# Altium PCB 智能笔 - 2个按键.PCBDOC
Units mil, origin at the board's own origin, x right, y up, seen from the top; angles counter-clockwise.
Board outline 1121.76 x 345.44 mil, 2 copper layers (TopLayer, BottomLayer); 9 components, 40 nets, 24 pads, 15 vias.
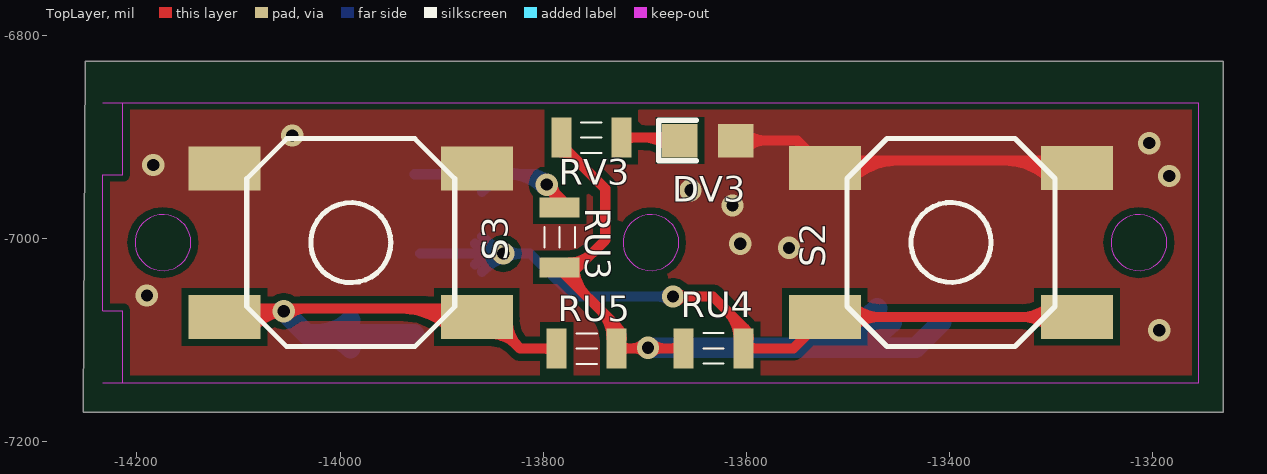
[diagram p0: TopLayer view]
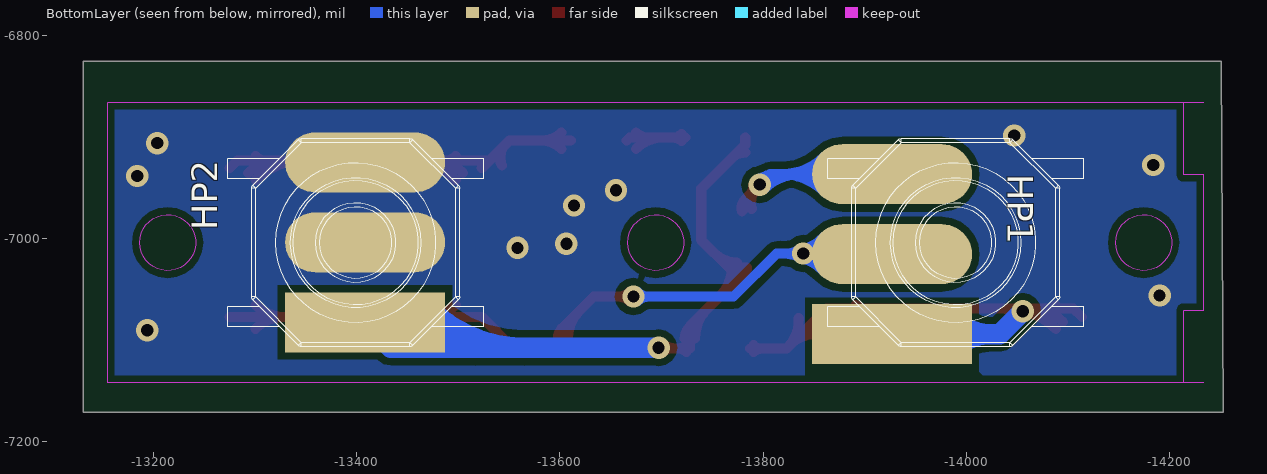
[diagram p1: BottomLayer view, seen from below]

## Layer stack, top to bottom
TopLayer: signal copper 1.4
Dielectric: core 12.6, FR-4, Dk 4.8
BottomLayer: signal copper 1.4

## Board outline
-14250.87,-6825.78 -13130.93,-6825.78 -13130.93,-7171.21 -14252.69,-7171.21

## Design rules (kind name [scope] priority, off if disabled: settings)
Clearance [All] p1: gap=7
ComponentClearance [All] p1 off: gap=10 collisioncheckmode=3
FanoutControl Fanout_LCC [All] p1 off: bgadir=Out bgaviamode=Centered fanoutstyle=Auto fanoutdirection=Alternating viagrid=1 // Protel DXP Scope 1 Expression Was: IsLCC   Fanout_LCC (Default Rule)
FanoutControl Fanout_BGA [All] p2 off: bgadir=Out bgaviamode=Centered fanoutstyle=Auto fanoutdirection=Alternating viagrid=1 // Protel DXP Scope 1 Expression Was: IsBGA   Fanout_BGA (Default Rule)
FanoutControl Fanout_SOIC [All] p3 off: bgadir=Out bgaviamode=Centered fanoutstyle=Auto fanoutdirection=Alternating viagrid=1 // Protel DXP Scope 1 Expression Was: IsSOIC   Fanout_SOIC (Default Rule)
FanoutControl Fanout_Default [All] p4: bgadir=Out bgaviamode=Centered fanoutstyle=Auto fanoutdirection=Alternating viagrid=1 // Fanout_Default (Default Rule)
FanoutControl Fanout_Small [All] p5 off: bgadir=Out bgaviamode=Centered fanoutstyle=Auto fanoutdirection=Alternating viagrid=1 // Protel DXP Scope 1 Expression Was: (CompPinCount < 5)   Fanout_Small (Default Rule)
PolygonConnect [All] p1: connectstyle=Direct reliefconductorwidth=10 reliefentries=4 polygonreliefangle="90 Angle"
RoutingVias [All] p1: holewidth=28 width=50 viastyle="Through Hole" minholewidth=28 minwidth=50 maxholewidth=28 maxwidth=50
SolderMaskExpansion [All] p1: expansion=4
TestPointUsage [All] p1: valid=0 allowmultiple=FALSE
Testpoint [(IsPad And (OnTopLayer Or OnBottomLayer))] p1: side=3 testpointundercomponent=TRUE minsize=40 maxsize=100 preferedsize=60 minholesize=20 maxholesize=40 preferedholesize=32 testpointgrid=1 style=297 order=-539222988
Width [All] p1: maxlimit=1111 minlimit=1 preferedwidth=10
12 further rules are at their usual default settings.

## Components (designator, comment, footprint, x,y, rotation, side; value= is the part's Value field where it differs from the comment)
DV3 "RED" 0603 -13637.54,-6903.73 r0 top
HP1 "Header 3" "2.0 3P 焊盘" -13926.81,-7094.25 r0 bottom
HP2 "Header 3" "2.0 3P 焊盘" -13408.18,-7082.57 r0 bottom
RU3 "10k" 0603-1 -13783.88,-6998.94 r270 top
RU4 "10k" 0603-1 -13632.56,-7108.28 r180 top
RU5 "10K" 0603-1 -13757.4,-7108.49 r0 top
RV3 "1K" 0603-1 -13752.81,-6900.72 r0 top
S2 "SW-PB" SW_smt4*4 -13398.84,-7003.98 r180 top
S3 "SW-PB" SW_smt4*4 -13989.6,-7004.21 r180 top

## Footprints (in the part's own frame and the unit in brackets; to place one, negate y for a bottom-side part, rotate by r counter-clockwise, add the part's x,y. Pads: shape width x height; smd on the part's side, far side on the other; paste and mask are expansions set on the pad)
"2.0 3P 焊盘" [mm]
  rect 4x1.5 smd: 1(0,0)
  oval 4x1.5 smd: 2(0,-2) 3(0,-4)
0603 [mil]
  rect 35x33 smd: 1(-28,0) 2(27,0)
  silkscreen extent -49,-20 -12,20
0603-1 [mm] "1.6mm*0.8mm*0.8mm"
  rect 0.5x1 smd: 1(-0.75,0) 2(0.75,0)
  silkscreen extent -0.25,-0.38 0.25,0.38
SW_smt4*4 [mm]
  rect 1.8x1.1 smd: 1(-3.153,1.859) 1(3.153,1.859) 2(-3.153,-1.859) 2(3.153,-1.859)
  silkscreen extent -2.6,-2.6 2.6,2.6

## Part data
DV3: library part LED1, "Typical RED GaAs LED"
HP1 HP2: "Header, 3-Pin"
RU3 RU4 RU5 RV3: library part Res2, "Resistor"
S2 S3: "Switch"

## Via types
v1: diameter 22, hole 12, TopLayer to BottomLayer, 15 vias

## Nets (pads, with @x,y where several pads share a name; then routed paths per layer and width w, separated by ;. In a path a pad name is that pad's centre, name@x,y a point inside that pad or via, vN(x,y) a via of type N, cw(c..) or ccw(c..) an arc to the next point about the centre after c; other vN are vias at no path point)
3.3V: HP2.1 RU3.2 RU4.2 RU5.2 RV3.1 | length 1226.9
  TopLayer w10: RV3.1 -13782.33,-6907.84 -13739.07,-6951.11 -13739.07,-7001.66 -13765.89,-7028.47 RU3.2 -13783.88,-7030.58 -13727.87,-7086.59 RU5.2 -13727.67,-7108.28 RU4.2 ; -13713.14,-7108.28 ccw(c-13713.14,-7091.52) v1@-13701.29,-7103.37 ; -13709.92,-7108.28 cw(c-13709.92,-7120.49) v1@-13701.29,-7111.86 ; v1@-13692.8,-7111.86 cw(c-13684.17,-7120.49) -13684.17,-7108.28 ; v1@-13692.8,-7103.37 ccw(c-13680.95,-7091.52) -13680.95,-7108.28 ; -13727.87,-7086.95 cw(c-13739.56,-7086.95) -13731.3,-7095.22 ccw(c-13739.56,-7086.95) -13727.87,-7086.95 ; -13727.87,-7086.95 ccw(c-13716.18,-7086.95) -13724.45,-7095.22 cw(c-13716.18,-7086.95) -13727.87,-7086.95 ; -13673.78,-7108.28 cw(c-13673.78,-7119.97) -13665.51,-7111.71 ccw(c-13673.78,-7119.97) -13673.78,-7108.28 ; -13673.78,-7108.28 ccw(c-13673.78,-7096.59) -13665.51,-7104.86 cw(c-13673.78,-7096.59) -13673.78,-7108.28 ; RV3.1@-13782.33,-6915.41 cw(c-13782.33,-6933.66) -13769.43,-6920.75 ccw(c-13782.33,-6933.66) RV3.1@-13782.33,-6915.41 ; RU3.2@-13779.19,-7028.47 ccw(c-13762.79,-7028.47) -13774.39,-7040.07 cw(c-13762.79,-7028.47) RU3.2@-13779.19,-7028.47 ; RU3.2@-13774.04,-7023.63 ccw(c-13774.04,-6992.27) -13751.86,-7014.44 cw(c-13774.04,-6992.27) RU3.2@-13774.04,-7023.63 ; RU3.2@-13769.19,-7028.47 ccw(c-13728.65,-7028.47) -13757.32,-7057.14 cw(c-13728.65,-7028.47) RU3.2@-13769.19,-7028.47 ; -13744.66,-7069.79 cw(c-13773.52,-7098.64) -13732.71,-7098.64 ccw(c-13773.52,-7098.64) -13744.66,-7069.79 ; -13727.59,-7086.86 cw(c-13739.37,-7098.64) -13722.71,-7098.64 ccw(c-13739.37,-7098.64) -13727.59,-7086.86 ; RU5.2@-13724.45,-7111.91 cw(c-13715.69,-7120.67) -13715.69,-7108.28 ccw(c-13715.69,-7120.67) RU5.2@-13724.45,-7111.91 ; RU5.2@-13724.45,-7105.06 ccw(c-13716.67,-7097.29) -13716.67,-7108.28 cw(c-13716.67,-7097.29) RU5.2@-13724.45,-7105.06
  BottomLayer w20: v1(-13697.04,-7107.62) -13433.23,-7107.62 HP2.1 ; -13565.02,-7107.62 ccw(c-13565.02,-6974.95) HP2.1@-13471.21,-7068.76 ; -13516.73,-7107.62 ccw(c-13516.73,-7023.23) HP2.1@-13457.06,-7082.9
GND: DV3.2 HP2.2 HP2.3 S2.2 S3.2 | length 871.9
  TopLayer w10: DV3.2 -13550.04,-6903.73 S2.2@-13522.98,-6930.79 ; S2.2@-13530.33,-6923.44 -13282.05,-6923.44 S2.2@-13274.7,-6930.79 ; -13581.78,-6903.73 cw(c-13581.78,-6875.96) -13601.41,-6895.6 ccw(c-13581.78,-6875.96) -13581.78,-6903.73 ; -13581.78,-6903.73 ccw(c-13581.78,-6931.49) -13601.41,-6911.86 cw(c-13581.78,-6931.49) -13581.78,-6903.73 ; -13546.68,-6907.09 cw(c-13559.96,-6920.37) -13542.83,-6928.06 ccw(c-13559.96,-6920.37) -13546.68,-6907.09 ; S2.2@-13504.49,-6935.49 cw(c-13475.4,-6964.59) -13475.4,-6923.44 ccw(c-13475.4,-6964.59) S2.2@-13504.49,-6935.49 ; S2.2@-13497.42,-6942.56 cw(c-13451.26,-6988.73) -13451.26,-6923.44 ccw(c-13451.26,-6988.73) S2.2@-13497.42,-6942.56 ; S2.2@-13497.42,-6919.01 ccw(c-13486.73,-6908.32) -13486.73,-6923.44 cw(c-13486.73,-6908.32) S2.2@-13497.42,-6919.01 ; -13346.43,-6923.44 cw(c-13346.43,-6988.73) -13300.26,-6942.56 ccw(c-13346.43,-6988.73) -13346.43,-6923.44 ; -13322.28,-6923.44 cw(c-13322.28,-6964.59) -13293.19,-6935.49 ccw(c-13322.28,-6964.59) -13322.28,-6923.44 ; -13310.95,-6923.44 ccw(c-13310.95,-6908.32) -13300.26,-6919.01 cw(c-13310.95,-6908.32) -13310.95,-6923.44
  other v1: -13193.81,-7090.39 -14190.2,-7056.21 -13558.19,-7009.29 -13606.27,-7005.24 -13613.8,-6967.58 -13655.1,-6952.65 -13183.96,-6938.62 -14183.93,-6927.8 -13203.66,-6906.18 -14047.12,-6898.64
NetCU3_2: 
NetCY1_1: 
NetCY1_2: 
NetCY2_1: 
NetCY2_2: 
NetCY5_2: 
NetCY6_1: 
NetCY7_1: 
NetD81_1: 
NetD81_2: 
NetD91_2: 
NetDUT1_1: 
NetDUT1_2: 
NetDV1_1: 
NetDV3_1: DV3.1 RV3.2 | length 182.9
  TopLayer w10: RV3.2 -13668.55,-6900.72 DV3.1 ; -13711.59,-6900.72 cw(c-13711.59,-6889.03) -13719.86,-6897.3 ccw(c-13711.59,-6889.03) -13711.59,-6900.72 ; -13711.59,-6900.72 ccw(c-13711.59,-6912.41) -13719.86,-6904.14 cw(c-13711.59,-6912.41) -13711.59,-6900.72 ; -13701.57,-6900.72 cw(c-13701.57,-6938.75) -13674.68,-6911.86 ccw(c-13701.57,-6938.75) -13701.57,-6900.72 ; -13687.05,-6900.72 ccw(c-13687.05,-6883.22) -13674.68,-6895.6 cw(c-13687.05,-6883.22) -13687.05,-6900.72
NetRY4_2: 
NetRZ1_1: 
NetRZ3_2: 
NRST: 
PA1: 
PA2: 
PA3: 
PB4: 
PB5: 
PC3: HP1.1 RU5.1 S3.1 | length 1142.4
  TopLayer w10: S3.1@-14113.73,-7077.4 -14105.44,-7069.11 -13862.26,-7069.11 -13822.88,-7108.49 RU5.1 ; -14076.21,-7069.11 cw(c-14076.21,-7092.39) v1@-14059.75,-7075.93 ; v1@-14051.26,-7075.93 cw(c-14034.8,-7092.39) -14034.8,-7069.11 ; -13798.62,-7108.49 cw(c-13798.62,-7120.18) -13790.35,-7111.91 ccw(c-13798.62,-7120.18) -13798.62,-7108.49 ; -13798.62,-7108.49 ccw(c-13798.62,-7096.8) -13790.35,-7105.06 cw(c-13798.62,-7096.8) -13798.62,-7108.49 ; S3.1@-14095.25,-7082.1 cw(c-14063.87,-7113.49) -14063.87,-7069.11 ccw(c-14063.87,-7113.49) S3.1@-14095.25,-7082.1 ; S3.1@-14088.18,-7089.18 cw(c-14039.72,-7137.63) -14039.72,-7069.11 ccw(c-14039.72,-7137.63) S3.1@-14088.18,-7089.18 ; S3.1@-14088.18,-7065.62 ccw(c-14079.78,-7057.22) -14079.78,-7069.11 cw(c-14079.78,-7057.22) S3.1@-14088.18,-7065.62 ; -13939.47,-7069.11 cw(c-13939.47,-7137.63) -13891.02,-7089.18 ccw(c-13939.47,-7137.63) -13939.47,-7069.11 ; -13915.33,-7069.11 cw(c-13915.33,-7113.49) -13883.94,-7082.1 ccw(c-13915.33,-7113.49) -13915.33,-7069.11 ; S3.1@-13899.42,-7069.11 ccw(c-13899.42,-7057.22) -13891.02,-7065.62 cw(c-13899.42,-7057.22) S3.1@-13899.42,-7069.11 ; S3.1@-13851.68,-7094.05 cw(c-13851.68,-7128.75) -13827.15,-7104.22 ccw(c-13851.68,-7128.75) S3.1@-13851.68,-7094.05 ; S3.1@-13835.05,-7078.36 ccw(c-13797.22,-7080.55) -13824.02,-7107.34 cw(c-13797.22,-7080.55) S3.1@-13835.05,-7078.36
  BottomLayer w20: v1(-14055.5,-7071.68) -14032.93,-7094.25 HP1.1 ; HP1.1@-13989.83,-7108.06 ccw(c-14023.17,-7141.4) -14023.17,-7094.25 ccw(c-14023.17,-7047.11) HP1.1@-13989.83,-7080.45
PC4: HP1.2 RU4.1 S2.1 | length 1595.5
  TopLayer w10: v1(-13672.32,-7057.22) -13633.13,-7057.22 -13603.03,-7087.31 ; S2.1@-13274.7,-7077.18 -13522.98,-7077.18 -13554.08,-7108.28 RU4.1 -13603.03,-7087.31 ; -13657.83,-7057.22 cw(c-13657.83,-7042.73) -13668.08,-7052.97 ccw(c-13657.83,-7042.73) -13657.83,-7057.22 ; -13657.83,-7057.22 ccw(c-13657.83,-7071.7) -13668.08,-7061.46 cw(c-13657.83,-7071.7) -13657.83,-7057.22 ; -13603.03,-7087.31 cw(c-13613.4,-7087.31) -13606.33,-7094.9 ccw(c-13613.4,-7087.31) -13603.03,-7087.31 ; -13603.03,-7087.31 ccw(c-13592.67,-7087.31) -13599.73,-7094.9 cw(c-13592.67,-7087.31) -13603.03,-7087.31 ; -13591.34,-7108.28 cw(c-13591.34,-7096.59) -13599.61,-7104.86 ccw(c-13591.34,-7096.59) -13591.34,-7108.28 ; -13591.34,-7108.28 ccw(c-13591.34,-7119.97) -13599.61,-7111.71 cw(c-13591.34,-7119.97) -13591.34,-7108.28 ; -13468.99,-7077.18 cw(c-13468.99,-7036.97) -13497.42,-7065.4 ccw(c-13468.99,-7036.97) -13468.99,-7077.18 ; -13468.99,-7077.18 ccw(c-13468.99,-7117.38) -13497.42,-7088.95 cw(c-13468.99,-7117.38) -13468.99,-7077.18 ; -13328.69,-7077.18 cw(c-13328.69,-7117.38) -13300.26,-7088.95 ccw(c-13328.69,-7117.38) -13328.69,-7077.18 ; -13328.69,-7077.18 ccw(c-13328.69,-7036.97) -13300.26,-7065.4 cw(c-13328.69,-7036.97) -13328.69,-7077.18 ; -13619.17,-7071.18 cw(c-13646.43,-7098.44) -13607.88,-7098.44 ccw(c-13646.43,-7098.44) -13619.17,-7071.18 ; -13602.1,-7088.25 cw(c-13612.29,-7098.44) -13597.88,-7098.44 ccw(c-13612.29,-7098.44) -13602.1,-7088.25
  BottomLayer w10: HP1.2@-13921.46,-7014.83 -13813.19,-7014.83 -13770.8,-7057.22 v1(-13672.32,-7057.22) ; HP1.2@-13853.97,-7014.83 cw(c-13853.97,-7029.31) -13843.72,-7019.07 ccw(c-13853.97,-7029.31) HP1.2@-13853.97,-7014.83 ; HP1.2@-13853.97,-7014.83 ccw(c-13853.97,-7000.34) -13843.72,-7010.58 cw(c-13853.97,-7000.34) HP1.2@-13853.97,-7014.83 ; -13825,-7014.83 cw(c-13825,-7000.34) -13835.24,-7010.58 ccw(c-13825,-7000.34) -13825,-7014.83 ; -13825,-7014.83 ccw(c-13825,-7029.31) -13835.24,-7019.07 cw(c-13825,-7029.31) -13825,-7014.83 ; -13686.81,-7057.22 cw(c-13686.81,-7071.7) -13676.56,-7061.46 ccw(c-13686.81,-7071.7) -13686.81,-7057.22 ; -13686.81,-7057.22 ccw(c-13686.81,-7042.73) -13676.56,-7052.97 cw(c-13686.81,-7042.73) -13686.81,-7057.22 ; HP1.2@-13867.33,-7025.79 cw(c-13840.87,-7052.25) -13840.87,-7014.83 ccw(c-13840.87,-7052.25) HP1.2@-13867.33,-7025.79 ; HP1.2@-13867.33,-7005.24 ccw(c-13844.19,-6982.1) -13844.19,-7014.83 cw(c-13844.19,-6982.1) HP1.2@-13867.33,-7005.24 ; HP1.2@-13860.25,-7032.86 cw(c-13816.72,-7076.39) -13816.72,-7014.83 ccw(c-13816.72,-7076.39) HP1.2@-13860.25,-7032.86 ; HP1.2@-13860.25,-6998.17 ccw(c-13820.04,-6957.96) -13820.04,-7014.83 cw(c-13820.04,-6957.96) HP1.2@-13860.25,-6998.17
  other v1: -13839.48,-7014.83
PC5: HP1.3 RU3.1 | length 740
  TopLayer w10: v1(-13796.66,-6947.07) -13783.88,-6959.85 RU3.1 ; -13786.42,-6957.31 cw(c-13776.17,-6947.07) -13790.66,-6947.07 ccw(c-13776.17,-6947.07) -13786.42,-6957.31 ; -13786.42,-6957.31 ccw(c-13796.66,-6967.55) -13796.66,-6953.07 cw(c-13796.66,-6967.55) -13786.42,-6957.31 ; v1@-13794.33,-6949.4 cw(c-13809.78,-6964.85) -13788.76,-6970.83 ccw(c-13809.78,-6964.85) v1@-13794.33,-6949.4 ; RU3.1@-13782.29,-6961.43 cw(c-13791.04,-6970.18) -13779.14,-6973.56 ccw(c-13791.04,-6970.18) RU3.1@-13782.29,-6961.43
  BottomLayer w10: HP1.3 -13806.95,-6936.77 v1(-13796.66,-6947.07) ; -13842.53,-6936.77 cw(c-13842.53,-6901.7) -13867.33,-6926.5 ccw(c-13842.53,-6901.7) -13842.53,-6936.77 ; -13842.53,-6936.77 ccw(c-13842.53,-6971.85) -13867.33,-6947.05 cw(c-13842.53,-6971.85) -13842.53,-6936.77 ; -13818.38,-6936.77 cw(c-13818.38,-6877.56) -13860.25,-6919.43 ccw(c-13818.38,-6877.56) -13818.38,-6936.77 ; -13818.38,-6936.77 ccw(c-13818.38,-6995.99) -13860.25,-6954.12 cw(c-13818.38,-6995.99) -13818.38,-6936.77 ; -13806.9,-6936.82 cw(c-13817.14,-6947.07) -13802.66,-6947.07 ccw(c-13817.14,-6947.07) -13806.9,-6936.82 ; -13806.9,-6936.82 ccw(c-13796.66,-6926.58) -13796.66,-6941.07 cw(c-13796.66,-6926.58) -13806.9,-6936.82 ; -13835.99,-6936.77 cw(c-13835.99,-6986.4) -13800.9,-6951.31 ccw(c-13835.99,-6986.4) -13835.99,-6936.77 ; -13811.85,-6936.77 cw(c-13811.85,-6962.26) -13793.83,-6944.24 ccw(c-13811.85,-6962.26) -13811.85,-6936.77
PC6: 
PC7: 
PD1: 
PD2: 
PD3: 
PD4: 
PD5: 
PD6: 
VCC+4.2V: 
XuotgID: 
XuotgVBUS: 

## Polygon pours and split planes (outlines as drawn)
GND on TopLayer (solid, remove dead copper): -14241.6,-6852.25 -13143.19,-6852.25 -13143.19,-7156.38 -14238.06,-7156.38
GND on BottomLayer (solid, remove dead copper): -14240.89,-6838.81 -13136.82,-6838.81 -13136.82,-7157.09 -14240.89,-7157.09

## Keep-outs
KeepOutLayer:
  circle w0.13: c-13694.11,-7004.07 r27.56
  circle w0.13: c-13213.8,-7004.07 r27.56
  circle w0.13: c-14174.43,-7004.07 r27.56
  circle w0.13: c-13694.11,-7004.07 r27.56
  circle w0.13: c-13213.8,-7004.07 r27.56
  lines w0.13: -14233.48,-7141.86 -13154.74,-7141.86 ; -14233.48,-6866.27 -13154.74,-6866.27 ; -13154.74,-7141.86 -14213.8,-7141.86 -14213.8,-7071 -14233.48,-7071 -14233.48,-6937.14 -14213.8,-6937.14 -14213.8,-6866.27 -13154.74,-6866.27 ; -13154.74,-7141.86 -13154.74,-6866.27 ; -13154.74,-7141.86 -13154.74,-6866.27

## Silkscreen, mask and mechanical layers (free items; w line width, h text height)
BottomOverlay:
  drawing of 228 lines, arcs and shapes, not listed